# EAGLE board v001 (EAGLE 6.4)
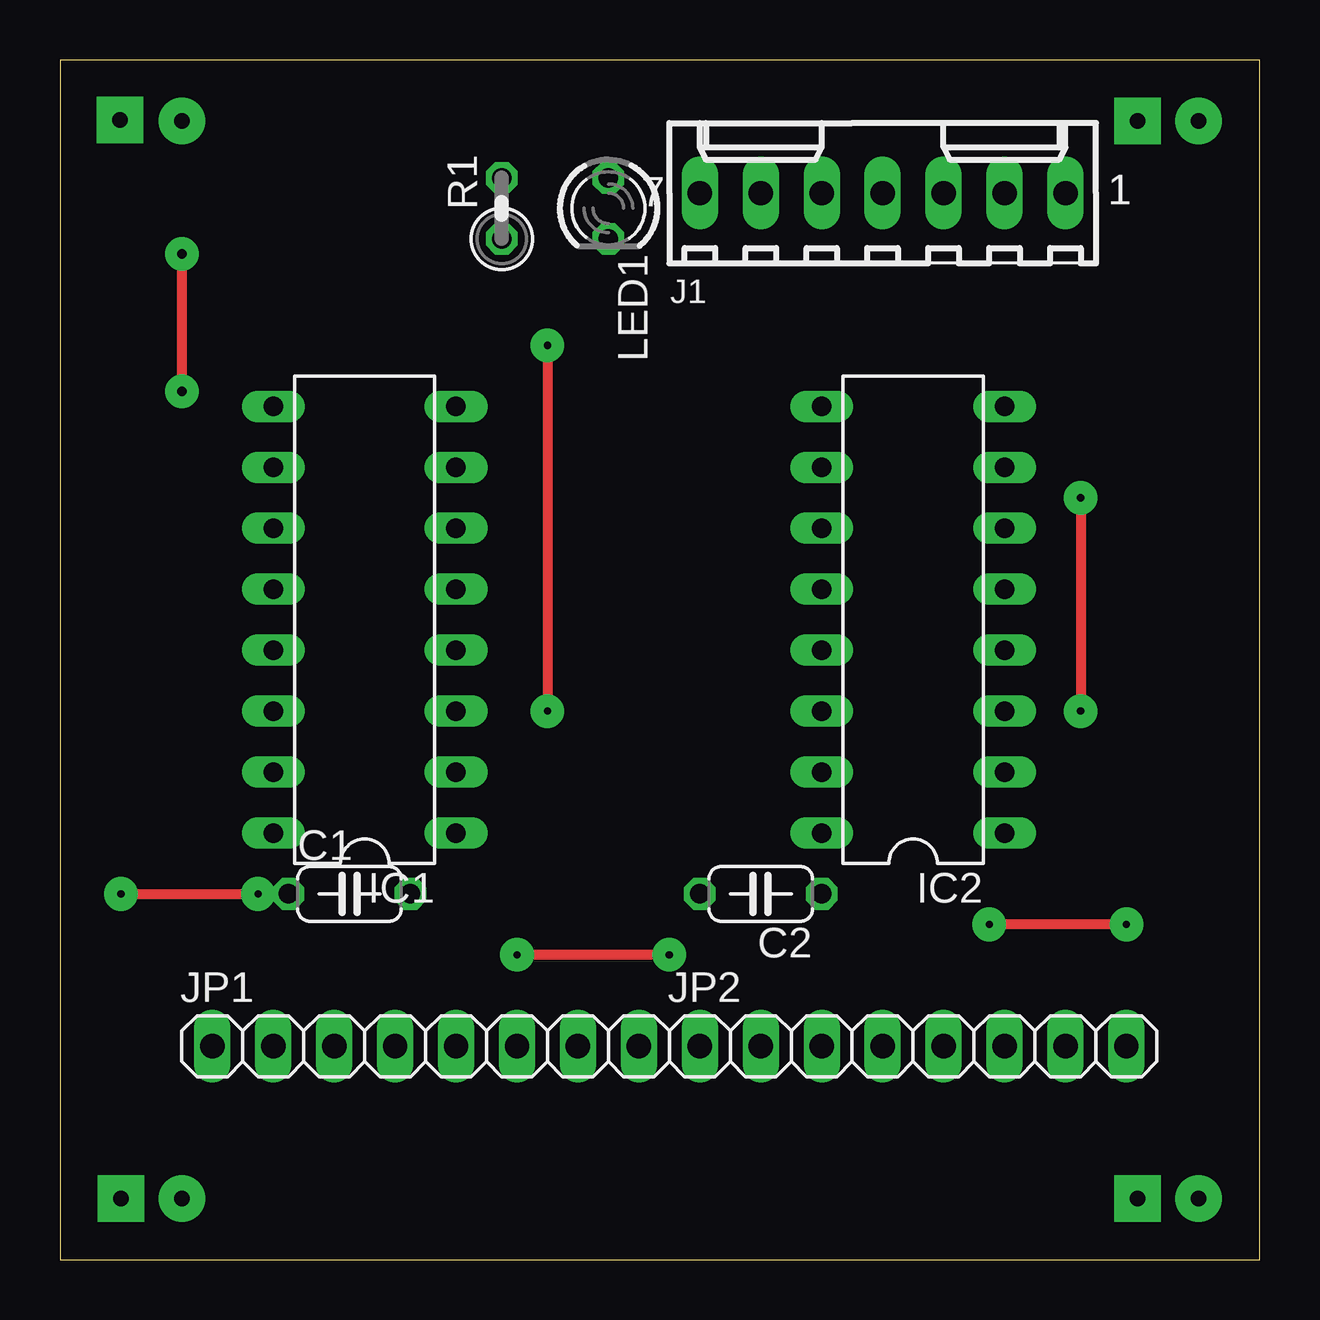
[diagram p0: board, top side]
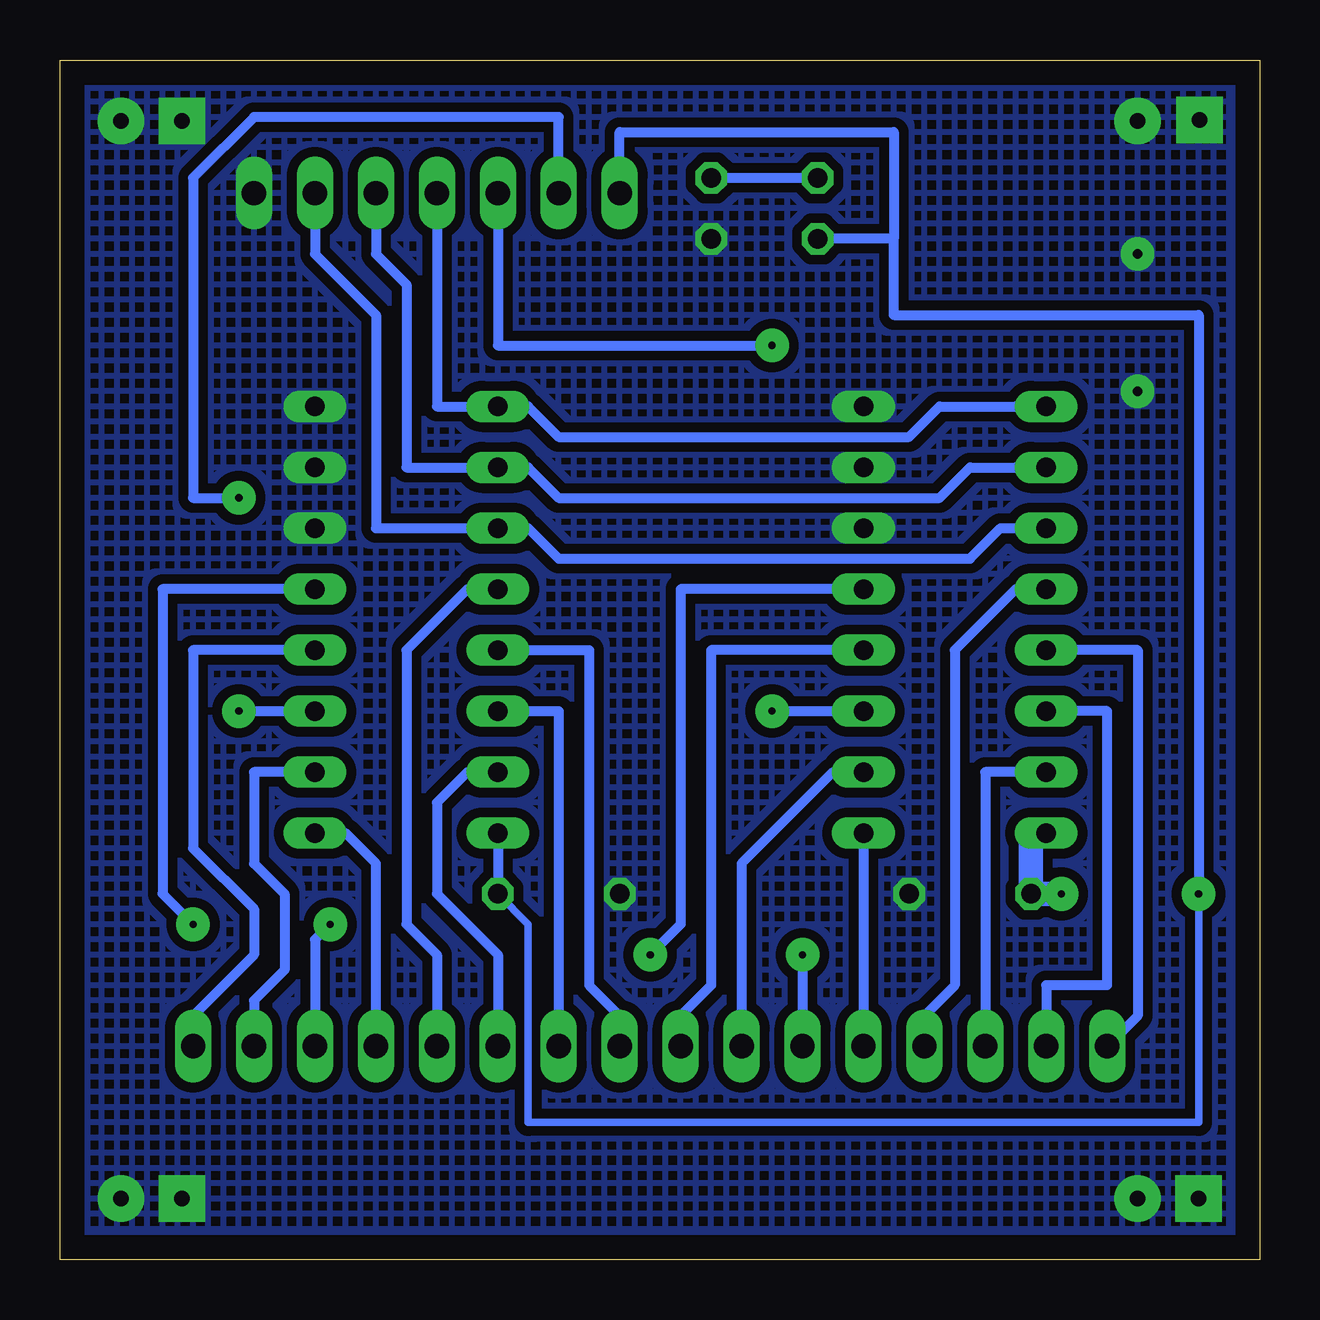
[diagram p1: board, bottom side, seen from below]

Size 50 x 50 mm. Coordinates in mm from the lower left corner, seen from the top.
Outline: 0,0 50,0 50,50 0,50 0,0
Copper layers (1*16): Top 0.035mm / dielectric 1.5mm / Bottom 0.035mm
Design rules "default": minimum track width 10mil, minimum drill 24mil, track to track 8mil, track to pad 8mil, pad to pad 8mil, via to via 8mil, smd to smd 8mil, copper to edge 40mil, drill to drill 8mil, minimum pad ring 10mil, minimum via ring 8mil, stop-mask expansion 4mil, vias tented up to drill 0mil, thermal gap 10mil

## Footprints (pad centres in the part's own frame; a part is rotated, then mirrored left to right if it is on the bottom)
C050-024X044 = drill 0.813 octagon: 1 -2.54,0; 2 2.54,0
DIL16 = drill 0.813 long: 1 -8.89,-3.81; 2 -6.35,-3.81; 3 -3.81,-3.81; 4 -1.27,-3.81; 5 1.27,-3.81; 6 3.81,-3.81; 7 6.35,-3.81; 8 8.89,-3.81; 9 8.89,3.81; 10 6.35,3.81; 11 3.81,3.81; 12 1.27,3.81; 13 -1.27,3.81; 14 -3.81,3.81; 15 -6.35,3.81; 16 -8.89,3.81
6410-07 = drill 1.016 long: 1 7.62,0; 2 5.08,0; 3 2.54,0; 4 0,0; 5 -2.54,0; 6 -5.08,0; 7 -7.62,0
1X08 = drill 1.016 long: 1 -8.89,0; 2 -6.35,0; 3 -3.81,0; 4 -1.27,0; 5 1.27,0; 6 3.81,0; 7 6.35,0; 8 8.89,0
LED3MM = drill 0.813 octagon: A -1.27,0; K 1.27,0
ZZZ_MODULE_05X05 = drill 0.64 pad 1.93 square: GND@1 2.5,47.5; GND@2 44.92,47.46; GND@7 2.54,2.54; GND@8 44.92,2.54 | drill 0.64 pad 1.93: GND@3 47.46,47.46; GND@4 5.08,47.46; GND@5 47.46,2.54; GND@6 5.08,2.54
0207/2V = drill 0.813 octagon: 1 -1.27,0; 2 1.27,0

## Placement (x,y rotation side)
C1  0.1uF  [C050-024X044]  12.06,15.24 0 top
C2  0.1uF  [C050-024X044]  29.21,15.24 180 top
IC1  4051N  [DIL16]  12.7,26.67 90 top
IC2  4051N  [DIL16]  35.56,26.67 90 top
J1  Input  [6410-07]  34.29,44.45 0 top
JP1  Input 1  [1X08]  15.24,8.89 0 top
JP2  Input 2  [1X08]  35.56,8.89 0 top
LED1  Green  [LED3MM]  22.86,43.81 270 top
PCB1  ZZZ_MODULE05X05  [ZZZ_MODULE_05X05]  0,0 0 top
R1  470R  [0207/2V]  18.41,43.81 90 top

## Library data of the parts
C1 C2 R1 = rcl
IC1 IC2 = 40xx
J1 = con-molex; OC_FARNELL: unknown; OC_NEWARK: unknown
JP1 JP2 = pinhead
LED1 = led
PCB1 = GNLib

## Nets
+5V: C1.1 C2.1 IC1.16 IC2.16 J1.7 R1.1
GND: C1.2 C2.2 IC1.6 IC1.7 IC1.8 IC2.6 IC2.7 IC2.8 J1.1 LED1.K PCB1.GND@1 PCB1.GND@2 PCB1.GND@3 PCB1.GND@4 PCB1.GND@5 PCB1.GND@6 PCB1.GND@7 PCB1.GND@8
INPUT_1: IC1.13 JP1.1
INPUT_2: IC1.14 JP1.2
INPUT_3: IC1.15 JP1.3
INPUT_4: IC1.12 JP1.4
INPUT_5: IC1.1 JP1.5
INPUT_6: IC1.5 JP1.6
INPUT_7: IC1.2 JP1.7
INPUT_8: IC1.4 JP1.8
INPUT_9: IC2.13 JP2.1
INPUT_10: IC2.14 JP2.2
INPUT_11: IC2.15 JP2.3
INPUT_12: IC2.12 JP2.4
INPUT_13: IC2.1 JP2.5
INPUT_14: IC2.5 JP2.6
INPUT_15: IC2.2 JP2.7
N$1: LED1.A R1.2
N$2: IC2.4 JP2.8
SECONDARY_1: IC1.3 J1.5
SECONDARY_2: IC2.3 J1.6
SELECT_D: IC1.11 IC2.11 J1.2
SELECT_E: IC1.10 IC2.10 J1.3
SELECT_F: IC1.9 IC2.9 J1.4

## Tracks (layer width: path | path; a pad name or v marks a point on that pad's centre or on a via)
+5V  (via drill 0.3 pad 1.4)
  Top 0.406: v2.54,15.24 v8.26,15.24
  Bottom 0.305: v2.54,15.24 2.54,5.71 30.48,5.71 30.48,13.97 C2.1
  Bottom 0.406: v2.54,15.24 2.54,39.37 15.24,39.37 15.24,42.55 | IC2.16 C2.1 | J1.7 26.67,46.99 15.24,46.99 15.24,42.55 | 15.24,42.55 R1.1
  Bottom 1.016: v8.26,15.24 C1.1 9.53,17.78 IC1.16
GND  (via drill 0.4 pad 1.4)
  Top 0.406: v5.08,41.91 v5.08,36.2
  pour Bottom (isolate 0.406, no thermals, hatched): 0,0 50,0 50,50 0,50
INPUT_1
  Bottom 0.406: IC1.13 5.08,25.4 5.08,10.16 JP1.1
INPUT_2
  Bottom 0.406: IC1.14 6.35,22.86 6.35,11.43 8.89,11.43 JP1.2
INPUT_3
  Bottom 0.406: IC1.15 11.43,20.32 JP1.3
INPUT_4
  Bottom 0.406: IC1.12 10.16,27.94 12.7,25.4 12.7,11.43 13.97,10.16 JP1.4
INPUT_5
  Bottom 0.406: IC1.1 JP1.5
INPUT_6  (via drill 0.3 pad 1.4)
  Top 0.406: v25.4,12.7 v19.05,12.7
  Bottom 0.406: IC1.5 24.13,27.94 24.13,13.97 v25.4,12.7 | v19.05,12.7 JP1.6
INPUT_7
  Bottom 0.406: IC1.2 17.78,20.32 21.59,16.51 JP1.7
INPUT_8
  Bottom 0.406: IC1.4 22.86,25.4 22.86,11.43 24.13,10.16 JP1.8
INPUT_9
  Bottom 0.406: IC2.13 27.94,25.4 27.94,11.43 26.67,10.16 JP2.1
INPUT_10
  Bottom 0.406: IC2.14 29.21,22.86 JP2.2
INPUT_11
  Bottom 0.406: IC2.15 33.02,20.32 34.29,19.05 34.29,15.24 31.75,12.7 JP2.3
INPUT_12
  Bottom 0.406: IC2.12 33.02,27.94 35.56,25.4 35.56,13.97 34.29,12.7 JP2.4
INPUT_13
  Bottom 0.406: JP2.5 36.83,16.51 38.1,17.78 IC2.1
INPUT_14  (via drill 0.3 pad 1.4)
  Top 0.406: v44.45,13.97 v38.73,13.97
  Bottom 0.406: IC2.5 45.72,27.94 45.72,15.24 v44.45,13.97 | v38.73,13.97 39.37,13.34 JP2.6
INPUT_15
  Bottom 0.406: IC2.2 41.91,20.32 41.91,16.51 40.64,15.24 40.64,12.06 41.91,10.79 JP2.7
N$1
  Bottom 0.406: LED1.A R1.2
N$2
  Bottom 0.406: IC2.4 44.45,25.4 44.45,17.14 41.91,14.61 41.91,12.7 44.45,10.16 JP2.8
SECONDARY_1  (via drill 0.3 pad 1.4)
  Top 0.406: v20.32,38.1 v20.32,22.86
  Bottom 0.406: v20.32,22.86 IC1.3 | v20.32,38.1 31.75,38.1 J1.5
SECONDARY_2  (via drill 0.3 pad 1.4)
  Top 0.406: v42.55,31.75 v42.55,22.86
  Bottom 0.406: v42.55,22.86 IC2.3 | v42.55,31.75 44.45,31.75 44.45,45.09 41.91,47.62 29.21,47.62 J1.6
SELECT_D
  Bottom 0.406: 10.16,30.48 IC1.11 10.79,30.48 12.06,29.21 29.21,29.21 30.48,30.48 IC2.11 36.83,30.48 36.83,39.37 39.37,41.91 J1.2
SELECT_E
  Bottom 0.406: 10.16,33.02 IC1.10 12.06,33.02 13.34,31.75 29.21,31.75 30.48,33.02 IC2.10 35.56,33.02 35.56,40.64 36.83,41.91 J1.3
SELECT_F
  Bottom 0.406: 10.16,35.56 IC1.9 13.34,35.56 14.61,34.29 29.21,34.29 30.48,35.56 IC2.9 34.29,35.56 J1.4